# Altium PCB NBP-28 Pin_Swap_Example.PcbDoc (part 4 of 4)
Units mil, origin at the board's own origin, x right, y up, seen from the top; angles counter-clockwise.
Board outline 2716.54 x 3916.86 mil, 10 copper layers (Top Layer, Mid-Layer 1, VCC1V2, Mid-Layer 2, VCC, GND, MidLayer4, VCCINT, Mid-Layer 3, Bottom Layer), stack 81 mil thick; 230 components, 429 nets, 1587 pads, 770 vias.
Unrouted connection lines stored in the file: 563.
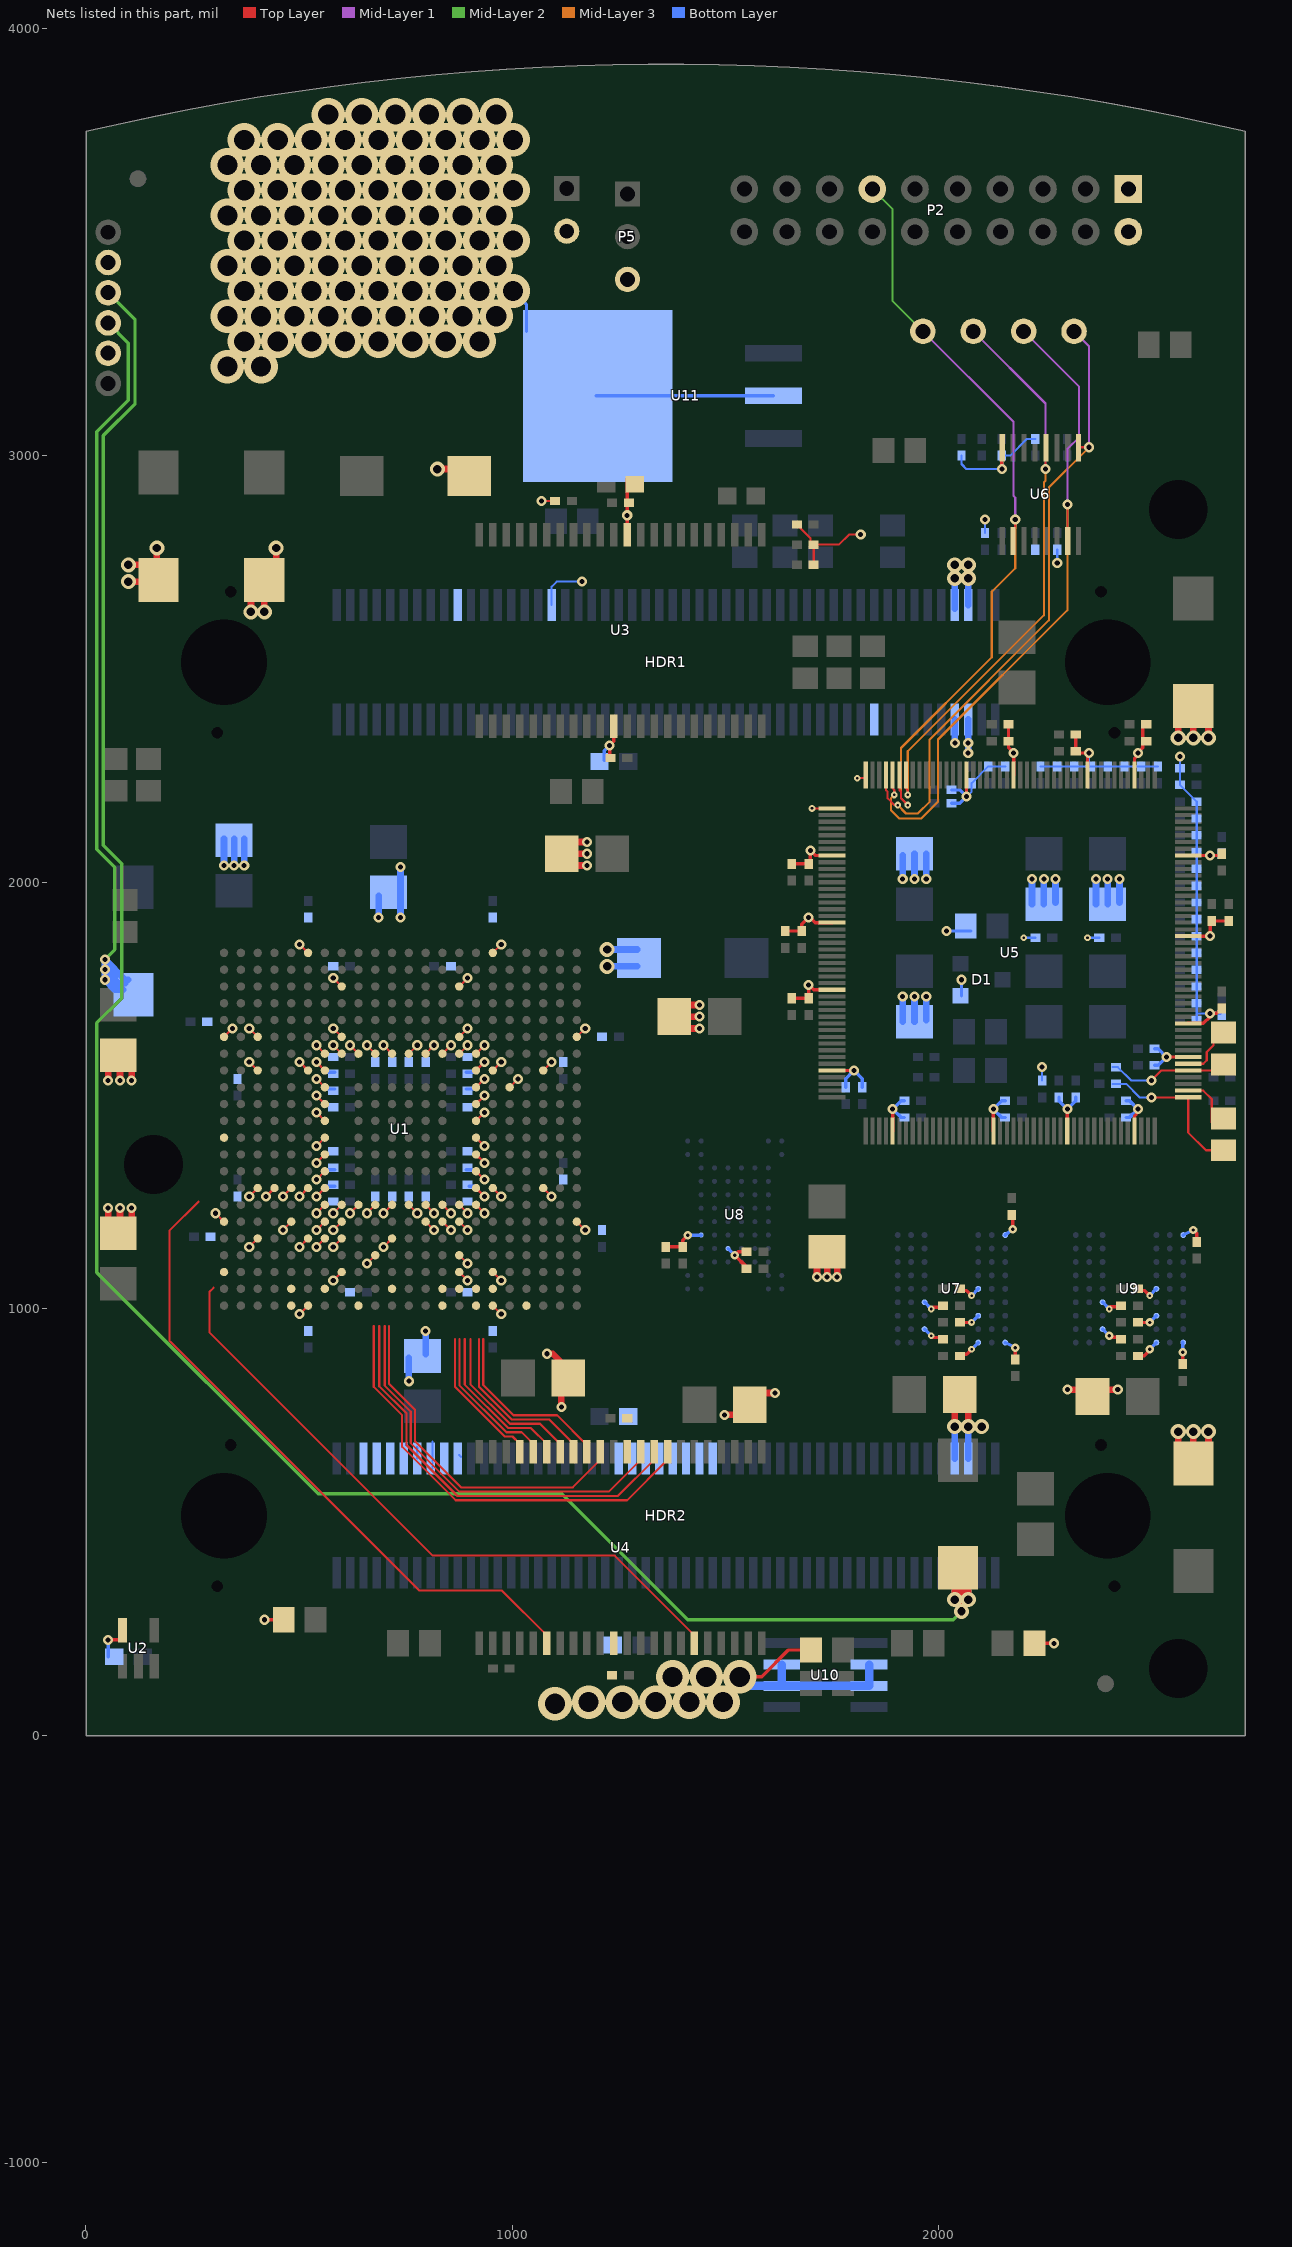
[diagram p10: the nets of this part, all layers, seen from the top]

## Via types
v1: diameter 23.62, hole 11.81, Top Layer to Bottom Layer, 495 vias
v2: diameter 78.74, hole 47.24, Top Layer to Bottom Layer, 101 vias
v3: diameter 15.75, hole 5.91, Top Layer to Bottom Layer, 92 vias
v4: diameter 35.43, hole 19.68, Top Layer to Bottom Layer, 59 vias
v5: diameter 19.68, hole 7.87, Top Layer to Bottom Layer, 23 vias

## Nets (pads, with @x,y where several pads share a name; then routed paths per layer and width w, separated by ;. In a path a pad name is that pad's centre, name@x,y a point inside that pad or via, vN(x,y) a via of type N, cw(c..) or ccw(c..) an arc to the next point about the centre after c; other vN are vias at no path point) (continued)
SRAM1_D9: U1.V7 U4.30 | length 1070.3
  Top Layer w5: v1(541.05,1145.37) U1.V7@560.74,1165.06 ; 675.45,960 675.45,817.45 741.93,750.97 741.93,676.93 867.31,551.54 1269.07,551.54 1363.89,646.36 U4.30@1363.89,665.06
SRAM1_D10: U1.R5 U4.31 | length 1016.9
  Top Layer w5: v1(462.31,1263.48) U1.R5@482,1283.17 ; 688.32,960 688.32,818.72 751.93,755.11 751.93,681.07 871.46,561.54 1247.58,561.54 1332.39,646.36 U4.31@1332.39,665.06
SRAM1_D11: U1.U7 U4.32 | length 963.5
  Top Layer w5: v1(541.05,1184.74) U1.U7@560.74,1204.43 ; 701.15,960 701.15,820.04 761.93,759.26 761.93,685.21 875.6,571.54 1226.08,571.54 1300.89,646.36 U4.32@1300.89,665.06
SRAM1_D12: U1.V8 U4.35 | length 848.3
  Top Layer w5: v1(580.42,1145.37) U1.V8@600.11,1165.06 ; 711.15,960 711.15,824.18 771.93,763.4 771.93,689.36 879.74,581.54 1141.59,581.54 1206.41,646.36 U4.35@1206.41,665.06
SRAM1_D13: U1.AA14 U4.36 | length 424.4
  Top Layer w5: 931.88,928.84 931.88,821.72 1002.91,750.69 1105.24,750.69 1174.91,681.02 U4.36@1174.91,665.06
SRAM1_D14: U1.AB14 U4.37 | length 406.9
  Top Layer w5: 921.88,928.84 921.88,817.58 998.77,740.69 1086.48,740.69 1143.41,683.76 U4.37@1143.41,665.06
SRAM1_D15: U1.U13 U4.38 | length 419.9
  Top Layer w5: U1.U13@796.96,1204.43 v1(816.64,1184.74) ; 901.76,928.84 901.76,823.56 994.63,730.69 1064.99,730.69 1111.92,683.76 U4.38@1111.92,665.06
SRAM1_E: U1.M1 U4.6 | length 1543.4
  Top Layer w5: 265,1251.67 196.41,1183.08 196.41,925.47 199.45,922.43 781.78,340.1 975.26,340.1 1080.42,234.94 U4.6@1080.42,216.24
SRAM1_LB: U1.V11 U4.39 | length 402.1
  Top Layer w5: v1(698.53,1145.37) U1.V11@718.22,1165.06 ; 888.7,928.84 888.7,822.47 990.49,720.69 1043.49,720.69 1080.42,683.76 U4.39@1080.42,665.06
SRAM1_OE: U1.AA11 U4.41 | length 337.2
  Top Layer w5: 865.95,928.84 865.95,816.94 982.2,700.69 1000.5,700.69 1017.43,683.76 U4.41@1017.43,665.06
SRAM1_UB: U1.W10 U4.40 | length 384.2
  Top Layer w5: v1(659.16,1106) U1.W10@678.85,1125.69 ; 875.95,928.84 875.95,821.08 986.35,710.69 1022,710.69 1048.93,683.76 U4.40@1048.93,665.06
SRAM1_W: U1.Y1 U4.17 | length 1558.5
  Top Layer w5: 300,1049.71 290,1039.71 290,945.01 813.47,421.54 1240.27,421.54 1426.88,234.94 U4.17@1426.88,216.24
SW0: HDR2.44 U1.AB16
SW1: HDR2.46 U1.AA15
SW2: HDR2.48 U1.AA16
SW3: HDR2.50 U1.AA17
SW4: HDR2.52 U1.W15 | length 27.8
  Top Layer w5: U1.W15@875.7,1125.69 v1(895.38,1106)
SW5: HDR2.54 U1.AB19
SW6: HDR2.56 U1.Y17 | length 27.8
  Top Layer w5: U1.Y17@954.44,1086.32 v1(974.12,1066.63)
SW7: HDR2.58 U1.U14 | length 27.8
  Top Layer w5: U1.U14@836.33,1204.43 v1(856.01,1184.74)
SWC0: HDR2.18 U1.R4 | length 27.8
  Top Layer w5: v1(422.94,1263.48) U1.R4@442.63,1283.17
SWC1: HDR2.16 U1.AA7 | length 63
  Bottom Layer w5: HDR2.16@812.7,625.69 812.7,688.68
SWC2: HDR2.14 U1.U5 | length 55.4
  Top Layer w5: v1(462.31,1184.74) U1.U5@482,1204.43
  Bottom Layer w5: HDR2.14@777.27,649.31 HDR2.14@777.27,676.87
SWC3: HDR2.6 U1.V3 | length 27.8
  Top Layer w5: v1(383.57,1145.37) U1.V3@403.26,1165.06
SWR0: HDR2.20 U1.AB9 | length 5.6
  Bottom Layer w5: HDR2.20@875.7,657.18 HDR2.20@879.63,653.25
SWR1: HDR2.12 U1.V6 | length 27.8
  Top Layer w5: v1(501.68,1145.37) U1.V6@521.37,1165.06
SWR2: HDR2.10 U1.AA5
SWR3: HDR2.8 U1.AB5
TCLK: TP4.1 U5.173 U6.9 | length 1476.8
  Top Layer w5: U5.173@1875.7,2251.67 1875.7,2216.24 1879.63,2212.3 1879.63,2196.55 1895.38,2180.81 v3(1903.26,2180.81) ; U6.9@2328.45,3019.39 v1(2352.08,3019.39)
  Mid-Layer 1 w5: TP4.1@2316.64,3291.04 2352.08,3255.61 v1(2352.08,3019.39)
  Mid-Layer 3 w5: v3(1903.26,2180.81) 1922.94,2161.12 1950.5,2161.12 1978.06,2188.68 1978.06,2334.35 2257.59,2613.88 2257.59,2924.9 v1(2352.08,3019.39)
TDI: TP6.1 U5.172 U6.7 | length 1600.1
  Top Layer w5: U5.172@1891.45,2251.67 1891.45,2220.18 1895.38,2216.24 v3(1895.38,2204.43) ; U6.7@2300.89,2800.89 v1(2300.89,2885.53)
  Mid-Layer 1 w5: TP6.1@2198.53,3291.04 2328.45,3161.12 2328.45,3043.01 2300.89,3015.45 v1(2300.89,2885.53)
  Mid-Layer 3 w5: v3(1895.38,2204.43) 1887.51,2196.55 1887.51,2169 1907.19,2149.31 1958.37,2149.31 1997.74,2188.68 1997.74,2334.35 2300.89,2637.5 v1(2300.89,2885.53)
TDO: P2.13 TP3.1 U5.171 U6.2 | length 1809.7
  Top Layer w5: U5.171@1907.19,2251.67 1907.19,2216.24 1911.13,2212.3 1911.13,2196.56 v3(1926.88,2180.81) ; U6.2@2170.97,2822.54 2178.85,2830.41 v1(2178.85,2850.1)
  Mid-Layer 1 w5: TP3.1@1962.31,3291.04 2174.91,3078.44 2174.91,2905.22 2178.85,2901.28 v1(2178.85,2850.1)
  Mid-Layer 2 w5: P2.13@1843.81,3624.51 1891.45,3576.87 1891.45,3361.91 TP3.1@1962.31,3291.04
  Mid-Layer 3 w5: v3(1926.88,2180.81) 1911.13,2196.56 1911.13,2314.67 2123.73,2527.26 2123.73,2680.81 2178.85,2735.92 v1(2178.85,2850.1)
TEST: HDR1.81 U1.J18 | length 27.8
  Top Layer w5: U1.J18@993.81,1519.39 v1(1013.49,1539.08)
TMS: TP5.1 U5.170 U6.12 | length 1388.5
  Top Layer w5: U5.170@1922.94,2251.67 1922.94,2220.18 1926.88,2216.24 v3(1926.88,2204.43) ; v1(2249.71,2968.21) U6.12@2249.71,3017.42
  Mid-Layer 1 w5: TP5.1@2080.42,3291.04 2249.71,3121.75 v1(2249.71,2968.21)
  Mid-Layer 3 w5: v3(1926.88,2204.43) 1926.88,2306.79 2245.78,2625.69 2245.78,2936.71 2249.71,2940.65 v1(2249.71,2968.21)
VCC1V2: C16.1 C17.1 C18.1 C19.1 C20.1 C21.1 C22.1 C23.1 C24.1 C25.1 C26.1 C27.1 C28.1 C29.1 C130.1 C131.1 TP9.1 U1.G7 U1.G8 U1.G15 U1.G16 U1.H7 U1.H16 U1.R7 U1.R16 U1.T7 U1.T8 U1.T15 U1.T16 U11.2 U11.4 | length 1550.3
  Top Layer w5: v1(541.05,1224.11) U1.T7@560.74,1243.8 ; v1(541.05,1263.48) U1.R7@560.74,1283.17 ; v1(541.05,1578.45) U1.H7@560.74,1558.76 ; v1(541.05,1617.82) U1.G7@560.74,1598.13 ; v1(580.42,1224.11) U1.T8@600.11,1243.8 ; v1(580.42,1617.82) U1.G8@600.11,1598.13 ; U1.T15@875.7,1243.8 v1(895.38,1224.11) ; U1.G15@875.7,1598.13 v1(895.38,1617.82) ; U1.T16@915.07,1243.8 v1(934.75,1224.11) ; U1.R16@915.07,1283.17 v1(934.75,1263.48) ; U1.H16@915.07,1558.76 v1(934.75,1578.45) ; U1.G16@915.07,1598.13 v1(934.75,1617.82)
  Top Layer w15.75: v4(100.11,2704.43) C130.1@174.91,2704.43 ; v4(100.11,2743.8) C130.1@163.1,2743.8 ; C130.1@167.04,2716.24 v4(167.04,2783.17) ; v4(824.52,2968.21) C131.1@883.57,2968.21
  Bottom Layer w7.87: 564.67,1287.11 C20.1@584.36,1287.11 ; 564.67,1326.48 C25.1@584.36,1326.48 ; 564.67,1515.45 C23.1@584.36,1515.45 ; 564.67,1554.82 C21.1@584.36,1554.82 ; C27.1@891.45,1326.48 911.13,1326.48 ; C29.1@891.45,1515.45 911.13,1515.45 ; C19.1@891.45,1554.82 911.13,1554.82 ; C18.1@899.32,1287.11 911.13,1287.11 ; v2(1001.68,3385.53) 1033.18,3354.04 U11.4@1033.18,3291.04 ; U11.4@1196.17,3139.86 U11.4@1200.5,3139.86 U11.2@1611.92,3139.86
  Bottom Layer w15.75: v1(686.72,1917.03) C17.1@686.72,1968.21 ; v1(737.9,1917.03) v1(737.9,2035.14) ; v1(757.59,830.41) C16.1@757.59,885.53 ; C16.1@796.96,893.41 v1(796.96,948.52)
  other v2: 332.39,3208.37 411.13,3208.37 371.76,3267.42 450.5,3267.42 529.24,3267.42 607.98,3267.42 686.72,3267.42 765.46,3267.42 844.2,3267.42 922.94,3267.42 332.39,3326.48 411.13,3326.48 489.87,3326.48 568.61,3326.48 647.35,3326.48 726.09,3326.48 804.83,3326.48 883.57,3326.48 962.31,3326.48 371.76,3385.53 450.5,3385.53 529.24,3385.53 607.98,3385.53 686.72,3385.53 765.46,3385.53 844.2,3385.53 922.94,3385.53 332.39,3444.59 411.13,3444.59 489.87,3444.59 568.61,3444.59 647.35,3444.59 726.09,3444.59 804.83,3444.59 883.57,3444.59 962.31,3444.59 371.76,3503.64 450.5,3503.64 529.24,3503.64 607.98,3503.64 686.72,3503.64 765.46,3503.64 844.2,3503.64 922.94,3503.64 1001.68,3503.64 332.39,3562.7 411.13,3562.7 489.87,3562.7 568.61,3562.7 647.35,3562.7 726.09,3562.7 804.83,3562.7 883.57,3562.7 962.31,3562.7 371.76,3621.75 450.5,3621.75 529.24,3621.75 607.98,3621.75 686.72,3621.75 765.46,3621.75 844.2,3621.75 922.94,3621.75 1001.68,3621.75 332.39,3680.81 411.13,3680.81 489.87,3680.81 568.61,3680.81 647.35,3680.81 726.09,3680.81 804.83,3680.81 883.57,3680.81 962.31,3680.81 371.76,3739.86 450.5,3739.86 529.24,3739.86 607.98,3739.86 686.72,3739.86 765.46,3739.86 844.2,3739.86 922.94,3739.86 1001.68,3739.86 568.61,3798.92 647.35,3798.92 726.09,3798.92 804.83,3798.92 883.57,3798.92 962.31,3798.92
VCC1V8: C88.1 C89.1 C90.1 C91.1 C92.1 C93.1 C94.1 C95.1 C96.1 C97.1 C98.1 C99.1 C100.1 C101.1 C132.1 C133.1 D1.1 HDR1.93 HDR1.95 HDR2.93 HDR2.95 R59.1 TP2.1 U5.40 U5.75 U5.95 U5.113 U5.136 U5.154 | length 6648
  Top Layer w7.87: U5.40@1749.71,1558.76 v1(1800.89,1558.76) ; C95.1@2163.1,2369.78 C96.1@2163.1,2330.41 2163.1,2314.67 v1(2174.91,2302.85) U5.154@2174.91,2251.67 ; U5.75@2300.89,1417.03 v1(2300.89,1468.21) ; U5.136@2458.37,2251.67 2458.37,2291.04 v1@2466.25,2298.92 ; v1(2466.25,2302.85) 2478.06,2314.67 C94.1@2478.06,2373.72 ; v1(2533.18,1590.26) U5.95@2584.36,1590.26 ; U5.113@2584.36,1873.72 v1(2635.54,1873.72) C101.1@2635.54,1905.22 ; C101.1@2639.48,1909.15 C93.1@2678.85,1909.15
  Top Layer w15.75: v4(2037.11,318.6) C132.1@2037.11,377.66 ; v4(2052.86,291.04) C132.1@2052.86,393.41 ; v4(2068.61,318.6) C132.1@2068.61,389.47 ; v4(2560.74,2338.29) C133.1@2560.74,2401.28 ; v4(2596.17,2338.29) C133.1@2596.17,2397.34 ; v4(2631.6,2338.29) C133.1@2631.6,2413.09
  Mid-Layer 2 w7.87: TP2.1@52.86,3381.59 115.85,3318.6 115.85,3121.75 41.05,3046.95 41.05,2086.32 84.36,2043.01 84.36,1728.05 26.36,1670.06 26.36,1085.26 544.99,566.63 1115.85,566.63 1411.13,271.36 2033.18,271.36 v4(2052.86,291.04)
  Bottom Layer w7.87: C97.1@1781.21,1519.39 1781.21,1539.07 v1(1800.89,1558.76) 1820.58,1539.07 C92.1@1820.58,1519.39 ; 2029.24,1885.53 R59.1@2074.52,1885.53 ; D1.1@2052.86,1733.96 v1(2052.86,1771.36) ; C98.1@2281.21,1495.77 2281.21,1487.89 v1(2300.89,1468.21) 2320.58,1487.89 C91.1@2320.58,1495.77 ; C99.1@2505.62,1570.57 2513.49,1570.57 v1(2533.18,1590.26) 2513.49,1609.94 C90.1@2505.62,1609.94
  Bottom Layer w15.75: C88.1@1915.07,1672.93 v1(1915.07,1731.99) ; C88.1@1942.63,1672.93 v1(1942.63,1731.99) ; C88.1@1970.19,1676.87 v1(1970.19,1731.99) ; v4(2037.11,318.6) HDR2.93@2037.12,381.59 ; v1(2037.11,2326.48) HDR1.93@2037.11,2381.59 ; v4(2068.61,318.6) HDR2.95@2068.61,381.59 ; v1(2068.61,2302.85) v1(2068.61,2326.48) HDR1.95@2068.61,2381.59 ; C89.1@2218.22,1948.52 v1(2218.22,2007.58) ; C89.1@2245.78,1948.52 v1(2245.78,2007.58) ; C89.1@2273.33,1952.46 v1(2273.33,2007.58)
  other v1: 2017.43,1885.53
VCC2V5: C2.1 C3.1 C4.1 C5.1 C6.1 C7.1 C8.1 C9.1 C10.1 C11.1 C128.1 C129.1 R64.1 TP7.1 U1.A6 U1.A17 U1.AB6 U1.AB17 U1.F1 U1.F22 U1.U1 U1.U22 U10.2 U10.3 U10.6 U10.7 | length 3137.9
  Top Layer w5: v1(304.83,1224.11) U1.U1@324.52,1204.43 ; U1.F1@324.52,1637.5 v1(344.2,1657.19) ; v1(501.68,987.89) U1.AB6@521.37,1007.58 ; v1(501.68,1854.04) U1.A6@521.37,1834.35 ; U1.AB17@954.44,1007.58 v1(974.12,987.89) ; U1.A17@954.44,1834.35 v1(974.12,1854.04) ; U1.U22@1151.29,1204.43 v1(1170.97,1184.74) ; U1.F22@1151.29,1637.5 v1(1170.97,1657.19)
  Top Layer w7.87: v2(1533.18,137.5) 1584.36,137.5 1647.35,200.49 R64.1@1700.5,200.49
  Top Layer w15.75: C3.1@44.99,1172.93 52.86,1176.87 v1(52.86,1235.92) ; C3.1@76.48,1172.93 80.42,1176.87 v1(80.42,1235.92) ; C3.1@107.98,1172.93 v1(107.98,1235.92) ; v1(1081.65,894.79) 1094.79,894.79 C2.1@1127.67,861.91 ; v1(1115,770) 1115,802 C2.1@1131.6,818.6
  Mid-Layer 2 w7.87: v1(44.99,1818.6) 68.61,1842.22 68.61,2035.14 26.36,2077.38 26.36,3055.88 100.11,3129.63 100.11,3263.48 TP7.1@52.86,3310.73
  Bottom Layer w15.75: v1(44.99,1771.36) 68.61,1747.74 C128.1@88.3,1747.74 ; C128.1@68.61,1779.23 44.99,1802.85 v1(44.99,1818.6) 92.23,1771.36 C128.1@100.11,1771.36 ; C128.1@72.55,1755.61 44.99,1783.17 v1(44.99,1794.98) 76.48,1763.48 C128.1@92.23,1763.48 ; v4(1222.15,1802.85) C129.1@1293.02,1802.85 ; v4(1222.15,1842.22) C129.1@1293.02,1842.22
  Bottom Layer w20: v2(1533.18,137.5) 1554.24,116.44 U10.6@1631.6,116.44 ; U10.7@1631.6,166.44 U10.6@1631.6,116.44 ; U10.2@1836.33,166.44 U10.3@1836.33,116.44 U10.6@1631.6,116.44
  other v2: 1100.11,74.51 1178.85,78.44 1257.59,78.44 1336.33,78.44 1415.07,78.44 1493.81,78.44 1375.7,137.5 1454.44,137.5
VCC3V3: C1.2 C12.1 C13.1 C14.1 C15.1 C30.1 C31.1 C32.1 C33.1 C34.1 C35.1 C36.1 C37.1 C38.1 C39.1 C40.1 C41.1 C42.1 C43.1 C44.1 C45.1 C46.1 C47.1 C48.1 C49.1 C50.1 C51.1 C52.1 C53.1 C54.1 C55.1 C56.1 C57.1 C58.1 C62.1 C66.1 C67.1 C68.1 C69.1 C70.1 C71.1 C72.1 C73.1 C74.1 C75.1 C76.1 C77.1 C78.1 C79.1 C80.1 C81.1 C82.1 C83.1 C84.1 C85.1 C86.1 C87.1 C102.1 C103.1 C104.1 C105.1 C106.1 C107.1 C108.1 C109.1 C110.1 C111.1 C112.1 C113.1 C114.1 C115.1 C116.1 C117.1 C118.1 C119.1 C120.1 C121.1 C122.1 C126.1 C127.1 HDR1.34 HDR1.94 HDR1.96 HDR2.94 HDR2.96 P1.2 P2.1 P2.2 P5.3 R1.1 R5.1 R15.2 R16.2 R17.2 R18.2 R20.2 R21.2 R22.2 R23.2 R24.2 R25.2 R26.2 R27.2 R28.2 R29.2 R30.2 R31.2 R32.2 R33.2 R34.2 R35.2 R39.2 R40.2 R41.2 R42.2 R43.2 R45.2 R48.2 R49.2 R50.2 R51.2 R52.2 R53.2 R54.2 R55.2 R56.2 R57.2 R61.1 R62.1 R67.1 TP1.1 U1.C8 U1.C15 U1.F8 U1.F15 U1.G9 U1.G10 U1.G11 U1.G12 U1.G13 U1.G14 U1.H3 U1.H6 U1.H17 U1.H20 U1.J7 U1.J16 U1.K7 U1.K16 U1.L7 U1.L16 U1.M7 U1.M16 U1.N7 U1.N16 U1.P7 U1.P16 U1.R3 U1.R6 U1.R17 U1.R20 U1.T9 U1.T10 U1.T11 U1.T12 U1.T13 U1.T14 U1.U8 U1.U15 U1.Y8 U1.Y15 U2.5 U3.11 U3.33 U4.11 U4.33 U5.1 U5.8 U5.18 U5.28 U5.49 U5.64 U5.85 U5.100 U5.125 U5.143 U5.161 U5.176 U6.16 U7.A7 U7.A9 U7.B3 U7.C7 U7.D3 U7.E7 U7.J9 U8.H7 U8.J5 U9.A7 U9.A9 U9.B3 U9.C7 U9.D3 U9.E7 U9.J9 | length 8194.9
  Top Layer w5: v1(383.57,1263.48) U1.R3@403.26,1283.17 ; v1(383.57,1578.45) U1.H3@403.26,1558.76 ; v1(501.68,1263.48) U1.R6@521.37,1283.17 ; v1(501.68,1578.45) U1.H6@521.37,1558.76 ; v1(541.05,1302.85) U1.P7@560.74,1322.54 ; v1(541.05,1342.22) U1.N7@560.74,1361.91 ; v1(541.05,1381.59) U1.M7@560.74,1401.28 ; v1(541.05,1460.34) U1.L7@560.74,1440.65 ; v1(541.05,1499.71) U1.K7@560.74,1480.02 ; v1(541.05,1539.08) U1.J7@560.74,1519.39 ; v1(580.42,1066.63) U1.Y8@600.11,1086.32 ; v1(580.42,1184.74) U1.U8@600.11,1204.43 ; v1(580.42,1657.19) U1.F8@600.11,1637.5 ; v1(580.42,1775.3) U1.C8@600.11,1755.61 ; v1(619.79,1224.11) U1.T9@639.48,1243.8 ; v1(619.79,1617.82) U1.G9@639.48,1598.13 ; v1(659.16,1224.11) U1.T10@678.85,1243.8 ; v1(659.16,1617.82) U1.G10@678.85,1598.13 ; v1(698.53,1224.11) U1.T11@718.22,1243.8 ; v1(698.53,1617.82) U1.G11@718.22,1598.13 ; U1.T12@757.59,1243.8 v1(777.27,1224.11) ; U1.G12@757.59,1598.13 v1(777.27,1617.82) ; U1.T13@796.96,1243.8 v1(816.64,1224.11) ; U1.G13@796.96,1598.13 v1(816.64,1617.82) ; U1.T14@836.33,1243.8 v1(856.01,1224.11) ; U1.G14@836.33,1598.13 v1(856.01,1617.82) ; U1.Y15@875.7,1086.32 v1(895.38,1066.63) ; U1.U15@875.7,1204.43 v1(895.38,1184.74) ; U1.F15@875.7,1637.5 v1(895.38,1657.19) ; U1.C15@875.7,1755.61 v1(895.38,1775.3) ; U1.P16@915.07,1322.54 v1(934.75,1302.85) ; U1.N16@915.07,1361.91 v1(934.75,1342.22) ; U1.M16@915.07,1401.28 v1(934.75,1381.59) ; U1.L16@915.07,1440.65 v1(934.75,1460.34) ; U1.K16@915.07,1480.02 v1(934.75,1499.71) ; U1.J16@915.07,1519.39 v1(934.75,1539.08) ; U1.R17@954.44,1283.17 v1(974.12,1263.48) ; U1.H17@954.44,1558.76 v1(974.12,1578.45) ; v1(1068.61,2893.41) R17.2@1100.11,2893.41 ; U1.R20@1072.55,1283.17 v1(1092.23,1263.48) ; U1.H20@1072.55,1558.76 v1(1092.23,1578.45) ; R24.2@1667.04,2838.29 1698.53,2806.79 R15.2@1698.53,2791.04 ; v3(1702.47,2172.93) U5.1@1749.71,2172.93 ; R18.2@1706.41,2743.8 R15.2@1706.41,2791.04 1765.46,2791.04 1789.08,2814.67 v1(1816.64,2814.67) ; v3(1808.77,2243.8) U5.176@1828.45,2243.8
  Top Layer w7.87: v1(52.86,224.11) U2.5@92.23,224.11 ; v1(419,271.36) R16.2@464.28,271.36 ; C53.1@1230.03,2291.04 1228.06,2293.01 v1(1228.06,2320.57) 1237.9,2330.41 U3.11@1237.9,2365.85 ; U3.33@1269.4,2809.74 U3.33@1269.4,2814.67 v1(1269.4,2859.94) C51.1@1269.4,2944.59 ; C105.1@1359.95,1145.37 C104.1@1399.32,1145.37 1399.32,1161.12 v5(1411.13,1172.93) ; C103.1@1548.93,1094.19 1548.93,1098.13 v5(1521.37,1125.69) 1529.24,1133.56 C106.1@1548.93,1133.56 ; C71.1@1639.48,1885.53 C81.1@1678.85,1885.53 1678.85,1901.28 v1(1694.59,1917.03) 1698.53,1917.03 1710.34,1905.22 U5.18@1749.71,1905.22 ; C70.1@1655.22,1728.05 C80.1@1694.59,1728.05 v1(1694.59,1759.55) 1706.41,1747.74 U5.28@1749.71,1747.74 ; C68.1@1655.22,2043.01 C78.1@1694.59,2043.01 ; C78.1@1698.53,2046.95 v1(1698.53,2074.51) 1710.34,2062.7 U5.8@1749.71,2062.7 ; U5.49@1891.45,1417.03 v1(1891.45,1468.21) ; v3(1982,936.71) 1985.93,932.78 C119.1@2013.49,932.78 ; v3(1982,999.7) 1985.93,1003.64 C121.1@2005.62,1003.64 ; C120.1@2044.99,893.41 2064.67,893.41 v3(2076.48,905.22) ; C109.1@2044.99,1043.01 2064.67,1043.01 v3(2076.48,1031.2) ; C118.1@2048.93,968.21 v3(2076.48,968.21) ; v1(2064.67,2200.49) U5.161@2064.67,2251.67 ; U5.64@2127.67,1417.03 v1(2127.67,1468.21) ; v1(2147.35,2968.21) U6.16@2147.35,3017.42 ; v5(2172.94,1186.71) C122.1@2172.94,1218.21 ; C108.1@2178.85,885.53 v5(2178.85,909.15) ; R5.1@2224.12,216.24 v1(2269.4,216.24) ; C86.1@2320.58,2306.79 C76.1@2320.58,2346.16 ; C86.1@2324.52,2302.85 v1(2352.08,2302.85) ; U5.143@2348.14,2251.67 v1@2348.14,2298.92 ; v3@2398.32,1000.7 2402.26,1004.64 C116.1@2421.95,1004.64 ; v5@2398.33,937.71 2402.26,933.78 C115.1@2429.82,933.78 ; U5.85@2458.37,1417.03 2458.37,1452.46 2466.25,1460.33 v1(2466.25,1468.21) ; C117.1@2461.32,890.47 2481,890.47 v5@2492.82,902.28 ; C107.1@2462.31,1043.01 2482,1043.01 v3(2493.81,1031.2) ; C112.1@2466.25,968.21 v5(2493.81,968.21) ; C114.1@2571.56,870.78 v5(2571.56,898.34) ; U5.100@2584.36,1669 2619.79,1669 2635.54,1684.74 v1(2635.54,1692.62) 2651.29,1692.62 C84.1@2663.1,1704.43 ; U5.125@2584.36,2062.7 v1(2635.54,2062.7) C75.1@2659.16,2062.7 ; v5(2596.17,1184.74) 2604.04,1176.87 C113.1@2604.04,1157.18
  Top Layer w15.75: C32.1@44.99,1598.13 52.86,1594.19 v1(52.86,1535.14) ; C32.1@76.48,1598.13 80.42,1594.19 v1(80.42,1535.14) ; v1(107.98,1535.14) C32.1@107.98,1598.13 ; v4(387.51,2633.56) C127.1@387.51,2696.55 ; v4(419,2633.56) C127.1@419,2692.62 ; C127.1@446.56,2720.18 v4(446.56,2783.17) ; C49.1@1111.92,2039.07 v1(1174.91,2039.07) ; C49.1@1111.92,2094.19 v1(1174.91,2094.19) ; C49.1@1115.85,2066.63 v1(1174.91,2066.63) ; C31.1@1375.7,1657.18 v1(1438.69,1657.18) ; C31.1@1375.7,1712.3 v1(1438.69,1712.3) ; C31.1@1379.63,1684.74 v1(1438.69,1684.74) ; v1(1497.74,751.67) C50.1@1548.93,751.67 ; C50.1@1552.86,802.85 v1(1615.85,802.85) ; v1(1714.28,1074.51) C102.1@1714.28,1117.81 ; v1(1737.9,1074.51) C102.1@1737.9,1125.69 ; v1(1761.52,1074.51) C102.1@1761.52,1121.75 ; v4(2037.11,724.11) C110.1@2037.11,783.17 ; C110.1@2048.93,798.92 2068.61,779.23 v4(2068.61,724.11) ; v1(2300.89,810.73) v1(2419,810.73) ; C126.1@2560.74,669 v4(2560.74,712.3) ; C126.1@2596.17,637.5 v4(2596.17,712.3) ; C126.1@2631.6,653.25 v4(2631.6,712.3)
  Bottom Layer w5: HDR1.34@1092.23,2649.31 1092.23,2692.62 1104.04,2704.43 v1(1163.1,2704.43) ; R67.1@2052.86,2999.7 2052.86,2980.02 2064.67,2968.21 v1(2147.35,2968.21) ; v1(2064.67,2200.49) 2076.48,2212.3 R56.2@2076.48,2231.99 R55.2@2115.85,2271.36 R54.2@2155.22,2271.36 ; R57.2@2107.98,2818.6 v1(2107.98,2850.1) ; C62.1@2147.35,2999.7 2167.04,2999.7 2206.41,3039.07 R62.1@2226.09,3039.07 ; v3(2198.53,1869.78) R29.2@2226.09,1869.78 ; R52.2@2237.9,2271.36 R51.2@2352.08,2271.36 ; R20.2@2241.84,1535.14 v1(2241.84,1566.63) ; v1(2277.27,2747.74) R61.1@2277.27,2779.23 ; v3(2348.14,1869.78) R30.2@2375.7,1869.78 ; v1(2352.08,2302.85) R51.2@2352.08,2271.36 ; R41.2@2513.49,2271.36 R42.2@2474.12,2271.36 R51.2@2352.08,2271.36 ; v1(2564.67,2294.98) R49.2@2564.67,2267.42 R40.2@2564.67,2228.05 R48.2@2604.04,2188.68 R39.2@2604.04,2149.31 R28.2@2604.04,1991.83 R35.2@2604.04,1873.72 R21.2@2604.04,1755.61 2604.04,1692.62 ; R23.2@2604.04,1676.87 2604.04,1692.62 ; R26.2@2607.98,2062.7 v1(2635.54,2062.7) ; v1(2635.54,1692.62) 2604.04,1692.62
  Bottom Layer w7.87: C1.2@52.86,184.74 v1(52.86,224.11) ; C52.1@1215.26,2285.14 1215.26,2307.78 v1(1228.06,2320.57) ; v5(1411.13,1172.93) U8.H7@1442.63,1172.93 ; U8.J5@1505.62,1141.44 v5(1521.37,1125.69) ; C79.1@1919,1448.52 1911.13,1448.52 v1(1891.45,1468.21) 1911.13,1487.89 C69.1@1919,1487.89 ; U7.B3@1966.25,952.46 v3(1982,936.71) ; U7.D3@1966.25,1015.45 v3(1982,999.7) ; C87.1@2029.24,2184.74 2048.93,2184.74 v1(2064.67,2200.49) 2048.93,2216.24 C77.1@2029.24,2216.24 ; v3(2076.48,905.22) U7.A7@2092.23,920.96 ; v3(2076.48,968.21) U7.C7@2092.23,983.96 ; v3(2076.48,1031.2) U7.E7@2092.23,1046.95 ; v1(2147.35,2968.21) C62.1@2147.35,2999.7 ; U7.A9@2155.22,920.96 v5(2178.85,909.15) ; U7.J9@2155.22,1172.93 v5(2172.94,1186.71) ; C83.1@2155.22,1448.52 2147.35,1448.52 v1(2127.67,1468.21) 2147.35,1487.89 C73.1@2155.22,1487.89 ; U9.B3@2383.57,952.46 v5(2399.32,936.71) ; U9.D3@2383.57,1015.45 v3(2399.32,999.7) ; C82.1@2438.69,1448.52 2446.56,1448.52 v1(2466.25,1468.21) 2446.56,1487.89 C72.1@2438.69,1487.89 ; v5(2493.81,905.22) U9.A7@2509.56,920.96 ; v5(2493.81,968.21) U9.C7@2509.56,983.96 ; v3(2493.81,1031.2) U9.E7@2509.56,1046.95 ; v5(2571.56,898.34) U9.A9@2571.56,921.96 ; U9.J9@2572.55,1172.93 v5(2596.17,1184.74) ; v1(2635.54,1692.62) C74.1@2659.16,1692.62 ; v1(2635.54,2062.7) C85.1@2659.16,2062.7
  Bottom Layer w15.75: v1(324.52,2039.07) C30.1@324.52,2102.07 ; v1(348.14,2039.07) C30.1@348.14,2098.13 C30.1@348.14,2102.07 ; v1(371.76,2039.07) C30.1@371.76,2102.07 ; v1(1915.07,2007.58) C67.1@1915.07,2062.7 ; v1(1942.63,2007.58) C67.1@1942.63,2066.63 ; v1(1970.19,2007.58) C67.1@1970.19,2066.63 ; HDR2.94@2037.12,649.31 v4(2037.11,724.11) v4(2068.61,724.11) ; HDR1.94@2037.11,2641.44 HDR1.94@2037.11,2649.31 v4(2037.11,2712.3) ; HDR2.96@2068.61,649.31 v4(2068.61,724.11) ; HDR1.96@2068.61,2649.31 v4(2068.61,2712.3) ; v4(2100.11,724.11) v4(2068.61,724.11) ; C66.1@2367.82,1948.52 v1(2367.82,2007.58) ; C66.1@2395.38,1948.52 v1(2395.38,2007.58) ; C66.1@2422.94,1952.46 v1(2422.94,2007.58) ; v4(2037.11,2712.3) v4(2068.61,2712.3) ; v4(2037.11,2712.3) v4(2037.11,2743.8) v4(2068.61,2743.8) v4(2068.61,2712.3)
VDRIVE: HDR1.20 U1.F3 | length 27.8
  Top Layer w5: v1(383.57,1657.19) U1.F3@403.26,1637.5
XTALIN: C59.2 R38.1 U5.93 | length 278.7
  Top Layer w5: v1(2497.74,1535.14) 2521.37,1558.76 U5.93@2584.36,1558.76 R38.1@2663.1,1558.76
  Bottom Layer w5: C59.2@2407.19,1566.63 C59.2@2415.07,1566.63 2419,1566.63 2450.5,1535.14 v1(2497.74,1535.14)
XTALIN_32K: C60.2 R47.1 U5.89 | length 372.7
  Top Layer w5: v1(2497.74,1495.77) U5.89@2584.36,1495.77 2584.36,1413.09 2625.7,1371.75 R47.1@2667.04,1371.75
  Bottom Layer w5: C60.2@2407.19,1527.26 C60.2@2415.07,1527.26 2438.69,1527.26 2470.19,1495.77 v1(2497.74,1495.77)
XTALOUT: R38.2 U5.94 | length 108.2
  Top Layer w5: U5.94@2584.36,1574.51 2619.79,1574.51 2627.67,1582.38 2627.67,1602.07 2643.41,1617.81 R38.2@2643.41,1637.5
XTALOUT_32K: R47.2 U5.90 | length 118.4
  Top Layer w5: U5.90@2584.36,1511.52 2619.79,1511.52 2639.48,1491.83 R47.2@2639.48,1436.71
pads on no net: D1.2 HDR1.91 HDR1.MH1 HDR1.MH2 HDR1.MH3 HDR1.MH4 HDR1.MH5 HDR1.MH6 HDR2.MH1 HDR2.MH2 HDR2.MH3 HDR2.MH4 HDR2.MH5 HDR2.MH6 U2.1 U5.145 U5.157 U5.162 U7.E2 U8.A1 U8.A2 U8.A7 U8.A8 U8.B1 U8.B7 U8.B8 U8.L1 U8.L2 U8.L7 U8.L8 U8.M1 U8.M2 U8.M7 U8.M8 U9.E2 U10.5 U10.8

## Polygon pours and split planes (outlines as drawn)
VCC1V2 on VCC1V2 (split plane): 1428.26,3896.61 1496.59,3895.42 1564.91,3893.45 1633.19,3890.69 1701.44,3887.14 1769.64,3882.8 1837.79,3877.67 1905.87,3871.76 1973.89,3865.06 2041.82,3857.58 2109.65,3849.31 2177.39,3840.26 2245.02,3830.43 2312.53,3819.81 2379.92,3808.42 2447.17,3796.25 2514.27,3783.31 2581.22,3769.59 2648.01,3755.1 2698.12,3743.61 2698.12,20.1 21.78,20.1 21.78,3743.63 71.84,3755.1 138.63,3769.59 205.57,3783.31 272.68,3796.25 339.93,3808.42 407.31,3819.81 474.82,3830.43 542.45,3840.26 610.19,3849.31 678.03,3857.58 745.96,3865.06 813.97,3871.76 882.06,3877.67 950.2,3882.8 1018.41,3887.14 1086.66,3890.69 1154.94,3893.45 1223.25,3895.42 1291.58,3896.61 1359.92,3897
VCC1V8 on VCC1V2 (split plane): 2684.9,2362.89 2684.9,1535 2684.9,227.11 2679.13,221.34 2015.87,221.34 1945.1,292.11 1945.1,1300 1944.71,1301.95 1943.6,1303.6 1740.1,1507.11 1740.1,2112.89 1993.6,2366.4 1993.61,2366.4 2022.11,2394.9 2652.89,2394.9
VCC3V3 on VCC (split plane): 1428.26,3896.61 1496.59,3895.42 1564.91,3893.45 1633.19,3890.69 1701.44,3887.14 1769.64,3882.8 1837.79,3877.67 1905.87,3871.76 1973.89,3865.06 2041.82,3857.58 2109.65,3849.31 2177.39,3840.26 2245.02,3830.43 2312.53,3819.81 2379.92,3808.42 2447.17,3796.25 2514.27,3783.31 2581.22,3769.59 2648.01,3755.1 2698.12,3743.61 2698.12,20.1 21.78,20.1 21.78,3743.63 71.84,3755.1 138.63,3769.59 205.57,3783.31 272.68,3796.25 339.93,3808.42 407.31,3819.81 474.82,3830.43 542.45,3840.26 610.19,3849.31 678.03,3857.58 745.96,3865.06 813.97,3871.76 882.06,3877.67 950.2,3882.8 1018.41,3887.14 1086.66,3890.69 1154.94,3893.45 1223.25,3895.42 1291.58,3896.61 1359.92,3897
GND on GND (split plane): 1428.26,3896.61 1496.59,3895.42 1564.91,3893.45 1633.19,3890.69 1701.44,3887.14 1769.64,3882.8 1837.79,3877.67 1905.87,3871.76 1973.89,3865.06 2041.82,3857.58 2109.65,3849.31 2177.39,3840.26 2245.02,3830.43 2312.53,3819.81 2379.92,3808.42 2447.17,3796.25 2514.27,3783.31 2581.22,3769.59 2648.01,3755.1 2698.12,3743.61 2698.12,20.1 21.78,20.1 21.78,3743.63 71.84,3755.1 138.63,3769.59 205.57,3783.31 272.68,3796.25 339.93,3808.42 407.31,3819.81 474.82,3830.43 542.45,3840.26 610.19,3849.31 678.03,3857.58 745.96,3865.06 813.97,3871.76 882.06,3877.67 950.2,3882.8 1018.41,3887.14 1086.66,3890.69 1154.94,3893.45 1223.25,3895.42 1291.58,3896.61 1359.92,3897
VCC2V5 on VCCINT (split plane): 1428.26,3896.61 1496.59,3895.42 1564.91,3893.45 1633.19,3890.69 1701.44,3887.14 1769.64,3882.8 1837.79,3877.67 1905.87,3871.76 1973.89,3865.06 2041.82,3857.58 2109.65,3849.31 2177.39,3840.26 2245.02,3830.43 2312.53,3819.81 2379.92,3808.42 2447.17,3796.25 2514.27,3783.31 2581.22,3769.59 2648.01,3755.1 2698.12,3743.61 2698.12,3129.09 2693.6,3133.6 2691.95,3134.71 2690,3135.1 1725,3135.1 1723.05,3134.71 1721.4,3133.6 1586.4,2998.6 1585.29,2996.95 1584.9,2995 1584.9,285 1585.29,283.05 1586.4,281.4 1671.4,196.4 1673.05,195.29 1675,194.9 2690,194.9 2691.95,195.29 2693.6,196.4 2698.12,200.91 2698.12,20.1 21.78,20.1 21.78,3743.63 71.84,3755.1 138.63,3769.59 205.57,3783.31 272.68,3796.25 339.93,3808.42 407.31,3819.81 474.82,3830.43 542.45,3840.26 610.19,3849.31 678.03,3857.58 745.96,3865.06 813.97,3871.76 882.06,3877.67 950.2,3882.8 1018.41,3887.14 1086.66,3890.69 1154.94,3893.45 1223.25,3895.42 1291.58,3896.61 1359.92,3897
+5V on VCCINT (split plane): 2694.9,3117.89 2694.9,212.11 2687.89,205.1 1677.11,205.1 1595.1,287.11 1595.1,2992.89 1727.11,3124.9 2687.89,3124.9

## Keep-outs
Top Layer:
  circle w10: c2390.4,121.11 r98.43
  circle w10: c122.69,3648.67 r98.43
Bottom Layer:
  circle w10: c2390.4,121.11 r98.43
  circle w10: c122.69,3648.67 r98.43
  rectangle: 2111.92,3377.66 2308.77,3472.14
Keep-Out Layer:
  lines w31.5: 1.68,-1048.3 1.68,3759.55 cw(c1359.92,-2020.01) 2718.19,3759.54 2718.22,-1050.3 3.68,-1050.3 1.68,-1048.3

## Other copper
Bottom Layer:
  region: 2202.47,1109.94 2257.59,1109.94
VCCINT (plane layer: these items are gaps in the copper):
  lines w10: 1590,285 1675,200 1800,200 2690,200 2700,210 2700,3120 2690,3130 1725,3130 1590,2995 1590,285
VCC1V2 (plane layer: these items are gaps in the copper):
  lines w10: 1735,1505 1940,1300 1940,290 2013.76,216.24 2121.24,216.24 2681.24,216.24 2690,225 2690,1535 2690,2365 2655,2400 2390,2400 2020,2400 1990,2370 1735,2115 1735,1505

## Silkscreen, mask and mechanical layers (free items; w line width, h text height)
Top Overlay:
  circle w5: c2560.74,2873.72 r98.43
  circle w5: c159.16,1338.29 r98.43
  circle w5: c2560.74,157.18 r62.99
  circle w5: c159.16,1338.29 r62.99
  circle w5: c159.16,1338.29 r108.27
  circle w5: c2560.74,2873.72 r62.99
  circle w5: c2560.74,2873.72 r108.27
  circle w10: c2245.78,1239.86 r106.3
  circle w10: c2218.22,901.28 r106.3
  circle w10: c1092.23,2952.46 r98.43
  lines w3.15: 1726.09,3259.55 1930.82,3259.55 1962.31,3291.04 ; 1733.97,3330.41 2041.05,3330.41 2080.42,3291.04 ; 2080.42,3330.41 2159.16,3330.41 2198.53,3291.04 ; 2316.64,3291.04 2356.01,3330.41 2462.31,3330.41 ; 2674.91,1680.81 2690.66,1696.55 2690.66,1869.78
  lines w5: 1.68,48.92 41.05,48.92 44.68,48.23 48.01,46.03 50.2,42.7 50.89,39.08 50.89,-0.3 ; 1.68,58.76 60.74,58.76 60.74,-0.3 ; 1.68,1490.85 80.42,1490.85 84.05,1491.54 87.38,1493.73 89.57,1497.06 90.26,1500.69 90.26,1530.22 89.57,1533.84 87.38,1537.18 84.05,1539.37 80.42,1540.06 1.68,1540.06 ; 1.68,2972.15 60.74,2972.15 60.74,3027.26 ; 1.68,2991.83 41.05,2991.83 44.68,2992.52 48.01,2994.71 50.2,2998.05 50.89,3001.67 50.89,3025.3 ; 1.73,3015.45 cw(c1359.97,-2764.1) 2718.22,3015.45 ; 1.73,3094.19 cw(c1359.97,-2685.36) 2718.22,3094.19 ; 2.02,859.51 92.57,859.51 92.57,934.31 2.05,934.31 ; 2.02,2091.79 92.57,2091.79 92.57,2166.59 2.05,2166.59 ; 119.79,1338.29 159.16,1338.29 ; 159.16,1298.92 159.16,1338.29 ; 159.16,1377.66 159.16,1338.29 ; 198.53,1338.29 159.16,1338.29 ; 619.79,3125.69 619.79,3074.51 670.97,3074.51 670.97,3129.63 ; 725.11,3136.52 725.11,3080.81 725.8,3077.18 727.99,3073.85 731.33,3071.66 734.95,3070.96 764.48,3070.96 768.1,3071.66 771.44,3073.85 773.63,3077.18 774.32,3080.81 774.32,3142.42 ; 730.03,216.24 769.4,216.24 ; 769.4,176.87 769.4,216.24 ; 769.4,255.61 769.4,216.24 ; 808.77,216.24 769.4,216.24 ; 1911.13,216.24 1950.5,216.24 ; 1945.58,3142.42 1945.58,3080.81 1946.27,3077.18 1948.46,3073.85 1951.8,3071.66 1955.42,3070.96 1984.95,3070.96 1988.57,3071.66 1991.91,3073.85 1994.1,3077.18 1994.79,3080.81 1994.79,3136.52 ; 1950.5,176.87 1950.5,216.24 ; 1950.5,255.61 1950.5,216.24 ; 1958.37,3141.44 1958.37,3098.13 2009.55,3098.13 2009.56,3137.5 ; 1989.87,216.24 1950.5,216.24 ; 2459,194.21 cw(c2560.74,157.18) 2484.18,80.63 ; 2468.25,190.85 cw(c2560.74,157.19) 2485.34,93.92 ; 2521.37,157.18 2560.74,157.18 ; 2521.37,2873.72 2560.74,2873.72 ; 2560.74,117.81 2560.74,157.18 ; 2560.74,196.55 2560.74,157.18 ; 2560.74,2834.35 2560.74,2873.72 ; 2560.74,2913.09 2560.74,2873.72 ; 2600.11,157.18 2560.74,157.18 ; 2600.11,2873.72 2560.74,2873.72 ; 2659.16,-0.3 2659.16,58.76 2718.22,58.76 ; 2659.16,3027.26 2659.16,2972.14 2718.22,2972.14 ; 2669,-0.3 2669,39.08 2669.7,42.7 2671.89,46.03 2675.22,48.23 2678.85,48.92 2718.22,48.92 ; 2669,3025.3 2669,3001.67 2669.7,2998.05 2671.89,2994.71 2675.22,2992.52 2678.85,2991.83 2718.22,2991.83 ; 2718.19,861.91 2627.66,861.91 2627.66,936.71 2718.22,936.71 ; 2718.22,1490.85 2639.48,1490.85 2635.85,1491.54 2632.52,1493.73 2630.33,1497.06 2629.63,1500.69 2629.63,1530.22 2630.33,1533.84 2632.52,1537.18 2635.85,1539.37 2639.48,1540.06 2718.22,1540.06 ; 2718.53,2094.19 2628.01,2094.19 2628.01,2169 2718.56,2169 ; 730.03,176.87 cw(c730.03,216.24) 730.03,255.61 808.77,255.61 cw(c808.77,216.24) 808.77,176.87 730.03,176.87 ; 1911.13,176.87 cw(c1911.13,216.24) 1911.13,255.61 1989.87,255.61 cw(c1989.87,216.24) 1989.87,176.87 1911.13,176.87
  text "LH79520 EXT DEBUG" at 1722.15,3779.23 h31.5
  text "OPEN: INTEGRATED" at 1269.4,3318.6 h31.5 r90
  text "CLOSED: EXTERNAL" at 1312.7,3318.6 h31.5 r90
  text "LH79520 DEBUG SELECT" at 1222.15,3263.48 h31.5 r90
  text "EXT DEBUG" at 2411.13,3169 h31.5
  text "ALL" at 1052.86,2980.02 h31.5
  text "4k7" at 1048.93,2932.78 h31.5
  text "ALL" at 2206.41,1255.61 h31.5
  text "100nF" at 2198.53,1208.37 h31.5
  text "ALL" at 2194.59,913.09 h31.5
  text "10nF" at 2202.47,865.85 h31.5
  text "LOADED" at 682.78,66.63 h31.5
  text "POWER" at 1891.45,66.63 h31.5
  text "Altium Advanced Training: '.Pcb_File_Name_No_Path'" at 20,-1163.34 h50
Bottom Overlay:
  drawing of 888 lines, arcs and shapes, not listed
  text "NBP#28" at 2378.59,3715.6 h31.5
  text "REV 1.00" at 2047.89,3711.66 h31.5
  text "1" at 551.68,2299.7 h31.5
  text "1" at 543.95,345.52 h31.5
Mechanical 1:
  lines w9.84: 1.67,-1100.45 1.7,3759.55 cw(c1359.95,-2020) 2718.22,3759.54 2718.22,-1100.45 ; 1.68,-1100.3 2718.22,-1100.3
  text "PCB boundary coincides with centre-line of tracks and arc" at -3.24,-1516.76 h31.5
Mechanical 2:
  text ".Printout_Name" at -3.24,-1280.54 h31.5
Mechanical 3:
  text ".Printout_Name" at -3.24,-1438.02 h31.5
Mechanical 11:
  drawing of 689 lines, arcs and shapes, not listed
  text "NBP28 Rev1.00" at 10720.76,8505.7 h50
  text "DESIGN INFORMATION" at 8515.76,8500.7 h60
  text "BOARD NAME:" at 9995.76,8500.7 h60
  text "BOARD TECHNOLOGY" at 8515.76,8400.7 h60
  text "BOARD SIZE (REFER ALSO PROFILING INFORMATION)" at 10415.76,8400.7 h50
  text "5.000" at 8599.26,8314.52 h60
  text "69.00mm" at 10522.84,8311.18 h60
  text "12.000" at 9135.39,8308.57 h60
  text "81.00mm" at 11428.36,8307.24 h60
  text "5.000" at 9687.77,8302.71 h60
  text "X" at 11150.76,8280.7 h70
  text "(MIN. TRACK/   PADS  /   CLEARANCE     IN 0.001'')" at 8455.76,8200.7 h50
  text "MINIMUM ANNULAR RING 0.125MM (0.005'') EXTERNAL PER IPC-2221 CLASS 3 LEVEL C AND IS THE" at 8515.76,8100.7 h50
  text "MANUFACTURING REGISTRATION ALLOWANCE" at 8515.76,8010.7 h50
  text "LAND SIZE CALCULATION MINIMUM - NOMINAL HOLE SIZE + 0.508MM (0.020'')" at 8515.76,7900.7 h50
  text "CIRCUIT TYPE:" at 8515.76,7720.7 h60
  text "SS" at 9415.76,7720.7 h50
  text "DS" at 10115.76,7720.7 h50
  text "X" at 10690.76,7720.7 h60
  text "PTH" at 10815.76,7720.7 h50
  text "ML" at 11245.76,7720.7 h50
  text "X" at 11395.76,7720.7 h60
  text "No. OF" at 11515.76,7720.7 h50
  text "8" at 12199.26,7714.52 h60
  text "FINGER CONNECTOR DIM PER:" at 8515.76,7600.7 h60
  text "AS SHOWN" at 11515.76,7600.7 h50
  text "No. OFF TOTAL" at 9175.76,7490.7 h60
  text "ONE SIDE" at 10815.76,7490.7 h50
  text "BOTH SIDES" at 11515.76,7480.7 h50
  text "VIAS:" at 8515.76,7375.7 h60
  text "NONE" at 8965.76,7375.7 h45
  text "X" at 9295.76,7375.7 h60
  text "FEED THRU'" at 9415.76,7375.7 h45
  text "TENTED" at 10115.76,7375.7 h45
  text "BURIED LAYER SEQUENCE" at 10815.76,7375.7 h45
  text "UNIQUE DRILL" at 9415.76,7255.7 h45
  text "2 SIZE" at 10115.76,7255.7 h45
  text "BLIND LAYER SEQUENCE" at 10815.76,7255.7 h45
  text "Layer Stack Manager (Protel)" at 9910.76,7165.7 h50
  text "X" at 11395.76,7165.7 h60
  text "AS SHOWN" at 11515.76,7165.7 h50
  text "LAYER CONSTRUCTION PER:" at 8515.76,7160.7 h60
  text "Protel" at 11705.76,7060.7 h50
  text "(PFW)" at 12110.76,7055.7 h50
  text "ARTWORK:" at 8515.76,7050.7 h60
  text "MANUAL" at 9415.76,7050.7 h50
  text "DIGITISED" at 10115.76,7050.7 h50
  text "X" at 10695.76,7050.7 h60
  text "CAD" at 10815.76,7050.7 h50
  text "TYPE" at 11245.76,7050.7 h50
  text "ARTWORK/PATTERN MASTER LIST" at 8515.76,6865.7 h60
  text "DESCRIPTION" at 8565.76,6770.7 h50
  text "DRAWING No./CAD FILE REF." at 9300.76,6770.7 h50
  text "LAYER NAME" at 10925.76,6770.7 h50
  text "GERBER FILE REF" at 11742.77,6767.71 h50
  text "PCB FILE" at 8505.76,6670.7 h50
  text "NBP28 Rev1.00" at 9307.29,6668.46 h50
  text "PcbDoc" at 10537.77,6667.71 h40
  text "Top Paste Mask" at 10859.77,6570.7 h40
  text "GTP" at 12537.77,6567.71 h50
  text "GERBER FILE" at 8505.76,6565.7 h50
  text "GTO" at 12535.76,6469.72 h50
  text "Top Overlay" at 10859.77,6468.7 h40
  text "GERBER FILE" at 8505.76,6465.7 h50
  text "Top Solder Mask" at 10859.77,6372.71 h40
  text "GTS" at 12537.77,6367.71 h50
  text "GERBER FILE" at 8505.76,6365.7 h50
  text "TOP LAYER" at 10859.77,6270.7 h40
  text "GTL" at 12537.77,6267.71 h50
  text "GERBER FILE" at 8505.76,6265.7 h50
  text "MIDLAYER3" at 10859.8,6170.77 h40
  text "G3" at 12533.03,6170.77 h50
  text "GERBER FILE" at 8505.76,6165.7 h50
  text "MIDLAYER1" at 10859.8,6072.35 h40
  text "G1" at 12533.03,6072.35 h50
  text "GERBER FILE" at 8505.76,6065.7 h50
  text "VCC" at 10859.77,5970.7 h40
  text "GERBER FILE" at 8505.76,5965.7 h50
  text "GP2" at 12537.77,5961.41 h50
  text "GND" at 10859.8,5875.5 h40
  text "GP1" at 12533.03,5875.5 h50
  text "GERBER FILE" at 8505.76,5865.7 h50
  text "VCCINT" at 10859.8,5777.07 h40
  text "GERBER FILE" at 8505.76,5765.7 h50
  text "GP3" at 12537.77,5764.56 h50
  text "MIDLAYER2" at 10859.8,5678.65 h40
  text "GERBER FILE" at 8505.76,5665.7 h50
  text "G2" at 12537.77,5666.14 h50
  text "BOTTOM LAYER" at 10859.77,5570.7 h40
  text "GBL" at 12537.77,5567.71 h50
  text "GERBER FILE" at 8505.76,5565.7 h50
  text "Bottom Solder Mask" at 10859.77,5472.71 h40
  text "GBS" at 12537.77,5467.71 h50
  text "GERBER FILE" at 8505.76,5465.7 h50
  text "Bottom Overlay" at 10859.77,5370.7 h40
  text "GBO" at 12537.77,5367.71 h50
  text "GERBER FILE" at 8505.76,5365.7 h50
  text "Bottom Paste Mask" at 10859.77,5272.71 h40
  text "GBP" at 12537.77,5267.71 h50
  text "GERBER FILE" at 8505.76,5265.7 h50
  text "PCB Boundary" at 10859.77,5170.7 h40
  text "GM1" at 12537.77,5167.71 h50
  text "GERBER FILE" at 8505.76,5165.7 h50
  text "Dimensions" at 10859.77,5070.7 h40
  text "GM4" at 12537.77,5067.71 h50
  text "GERBER FILE" at 8505.76,5065.7 h50
  text "APERTURE LIST" at 8505.76,4970.7 h50
  text "APR" at 10577.14,4967.71 h50
  text "DRILL REPORT" at 8505.76,4870.7 h50
  text "DRR" at 10577.14,4867.71 h50
  text "DRILL FILE" at 8495.28,4768.07 h50
  text "DRL" at 10572.21,4762.4 h50
  text "TXT" at 10566.15,4667.67 h50
  text "EXCELLON DRILL" at 8492.33,4664.72 h50
  text "MATERIAL:" at 8515.76,4460.7 h60
  text "GLASS FIBRE EPOXY RESIN NEMA GRADE FR4 (MIL-S-13949H)" at 9525.76,4450.7 h50
  text "X" at 9420.76,4445.7 h60
  text "THICKNESS:" at 8825.76,4335.7 h50
  text "0.8mm" at 9525.76,4335.7 h50
  text "1.2mm" at 10220.76,4335.7 h50
  text "1.6mm" at 10915.76,4335.7 h50
  text "2.4mm" at 11615.76,4335.7 h50
  text "3.2mm" at 12315.76,4335.7 h50
  text "X" at 10820.76,4330.7 h60
  text "TOLERANCE:" at 8820.76,4215.7 h50
  text "IN A/W IPC-D-300G CLASS" at 9515.76,4215.7 h50
  text "3 LEVEL B" at 10890.76,4215.7 h50
  text "OTHER +/-" at 11615.76,4215.7 h50
  text "X" at 9420.76,4210.7 h60
  text "BOW & TWIST:" at 8725.76,4095.7 h50
  text "IN A/W IPC-D-300G CLASS" at 9515.76,4095.7 h50
  text "3 LEVEL B" at 10890.76,4095.7 h50
  text "AS SHOWN" at 11620.76,4090.7 h50
  text "X" at 9420.76,4085.7 h60
  text "COPPER THICKNESS (FINISHED)" at 8820.76,3965.7 h50
  text "OUTER:" at 9010.76,3875.7 h50
  text "18um" at 9525.76,3875.7 h50
  text "35um" at 10590.76,3875.7 h50
  text "70um" at 11625.76,3875.7 h50
  text "X" at 10482.77,3867.71 h60
  text "INNER SIGNAL:" at 8680.76,3755.7 h50
  text "18um" at 9525.76,3755.7 h50
  text "35um" at 10590.76,3755.7 h50
  text "70um" at 11625.76,3755.7 h50
  text "X" at 10480.76,3747.71 h60
  text "INNER PWR:" at 8825.76,3635.7 h50
  text "18um" at 9525.76,3635.7 h50
  text "35um" at 10590.76,3635.7 h50
  text "70um" at 11625.76,3635.7 h50
  text "X" at 10485.76,3630.7 h60
  text "STRUCTURE:" at 8515.76,3515.7 h60
  text "REFER" at 9525.76,3515.7 h50
  text "AS PER DRAWING No." at 9520.76,3390.7 h50
  text "AS SHOWN" at 11620.76,3390.7 h50
  text "X" at 11520.76,3385.7 h60
  text "DRILLING:" at 8515.76,3280.7 h60
  text "VIEWED FROM:" at 8710.76,3190.7 h50
  text "COMPONENT SIDE" at 9525.76,3190.7 h45
  text "SOLDER SIDE" at 10580.76,3190.7 h45
  text "X" at 9420.76,3180.7 h60
  text "REFERENCE:" at 8800.76,3070.7 h50
  text "AS SHOWN" at 9520.76,3065.7 h45
  text "PATTERN MASTER LIST" at 10585.76,3065.7 h45
  text "X" at 11520.76,3065.7 h60
  text "NC_DRILL FILES" at 11620.76,3065.7 h45
  text "X" at 9420.76,3060.7 h60
  text "PTH MINIMUM COPPER THICKNESS:" at 9030.76,2950.7 h50
  text "20um" at 10590.76,2950.7 h50
  text "X" at 10485.76,2945.7 h60
  text "OTHER" at 11620.76,2945.7 h50
  text "NPTH:" at 9050.76,2830.7 h50
  text "TENTED" at 9520.76,2825.7 h45
  text "X" at 10485.76,2825.7 h60
  text "PADS REMOVED" at 10585.76,2825.7 h45
  text "REMOVE PADS" at 11620.76,2825.7 h45
  text "X" at 9420.76,2820.7 h60
  text "2nd DRILL" at 9520.76,2705.7 h45
  text "BOTH" at 10585.76,2705.7 h45
  text "AS SHOWN" at 11070.76,2705.7 h45
  text "NONE" at 11620.76,2705.7 h45
  text "BOARD FINISH:" at 8515.76,2590.7 h60
  text "X" at 9420.76,2585.7 h60
  text "ETCHING" at 9520.76,2585.7 h45
  text "REFER PATTERN MASTER LIST" at 10585.76,2585.7 h45
  text "LEGEND / SCREEN PRINT:" at 9315.76,2470.7 h50
  text "NONE" at 10585.76,2465.7 h45
  text "COMPONENT" at 11070.76,2465.7 h45
  text "SOLDER" at 11620.76,2465.7 h45
  text "X" at 10970.76,2460.7 h60
  text "X" at 11520.76,2460.7 h60
  text "COLOUR:" at 8930.76,2350.7 h50
  text "WHITE" at 9520.76,2345.7 h45
  text "YELLOW" at 10585.76,2345.7 h45
  text "OTHER" at 11620.76,2345.7 h45
  text "X" at 9420.76,2340.7 h60
  text "X" at 9420.76,2225.7 h60
  text "LIQUID PHOTOIMAGEABLE" at 9520.76,2225.7 h45
  text "SCREEN PRINT" at 11070.76,2225.7 h45
  text "MATTE" at 9520.76,2105.7 h45
  text "GLOSS" at 10020.76,2105.7 h45
  text "GREEN" at 10585.76,2105.7 h45
  text "BLUE" at 11070.76,2105.7 h45
  text "G/Y" at 11620.76,2105.7 h45
  text "OTHER" at 12070.76,2105.7 h45
  text "X" at 9915.76,2100.7 h60
  text "SOLDER MASK COLOUR:" at 8515.76,1990.7 h45
  text "BLACK" at 9520.76,1985.7 h45
  text "GREEN" at 10020.76,1985.7 h45
  text "YELLOW" at 10585.76,1985.7 h45
  text "BLUE" at 11070.76,1985.7 h45
  text "OTHER" at 11620.76,1985.7 h45
  text "X" at 9415.76,1980.7 h60
  text "TRACK FINISH:" at 8515.76,1870.7 h60
  text "SELECTIVE SOLDER (HASL)" at 9520.76,1865.7 h45
  text "REFLOW SOLDER" at 11070.76,1865.7 h45
  text "SELECTIVE GOLD" at 9520.76,1745.7 h45
  text "um  (AREA" at 10585.76,1745.7 h45
  text "sq. mm)" at 11680.76,1745.7 h45
  text "X" at 9415.56,1626.14 h60
  text "IMMERSION GOLD" at 9520.76,1625.7 h45
  text "OTHER" at 11070.76,1625.7 h45
  text "EDGE BOARD" at 8515.76,1510.7 h60
  text "1.3um HARD GOLD OVER 5um     NICKEL / TIN-NICKEL" at 9520.76,1505.7 h45
  text "CONTACTS:" at 8515.76,1425.7 h60
  text "HARD FINISH GOLDE PLATE" at 9520.76,1385.7 h45
  text "OTHER" at 11070.76,1385.7 h45
  text "AS SHOWN" at 9520.76,1265.7 h45
  text "REFER" at 11070.76,1265.7 h45
  text "PROFILING:" at 8515.76,1145.7 h60
  text "AS DIMENSIONED, MEASURED AND CUT FROM SPECIFIED DATUM." at 9520.76,1145.7 h45
  text "X" at 9420.76,1140.7 h60
  text "REFER PCB BLANK DWG No." at 9525.76,1030.7 h50
  text "USE PROFILE / ROUTE TAPE SUPPLIED (REFER PATTERN MASTER LIST)" at 9525.76,910.7 h50
  text "SQUARE CUT" at 9525.76,790.7 h50
  text "N.C. ROUTE" at 10225.76,790.7 h50
  text "V. SCORE" at 10925.76,790.7 h50
  text "BLANK" at 11625.76,790.7 h50
  text "ACCEPTABILITY:" at 8515.76,685.7 h60
  text "MATERIALS AND WORKMANSHIP FOR ALL PRINTED WIRING BOARDS TO MEET" at 9390.76,680.7 h50
  text "OR EXCEED THE REQUIREMENTS OF:" at 9390.76,570.7 h50
  text "IPC-6011/12 AND IPC-A-600E" at 9530.76,465.7 h50
  text "1" at 10930.76,465.7 h50
  text "2" at 11280.76,465.7 h50
  text "X" at 11175.76,460.7 h60
  text "X" at 9425.76,455.7 h60
  text "3" at 11630.76,380.7 h50
  text "UL CERTIFICATION" at 9530.76,345.7 h50
  text "AUSTEL" at 10930.76,345.7 h50
  text "X" at 9425.76,340.7 h60
  text "ML-P-55110F GRP" at 9510.76,225.7 h40
  text "A" at 10230.76,225.7 h50
  text "B" at 10580.76,225.7 h50
  text "AS2546" at 10930.76,225.7 h50
  text "OTHER" at 11630.76,225.7 h50
  text "ADDITIONAL" at 8515.76,110.7 h60
  text "NONE" at 9530.76,100.7 h50
  text "SAMPLE PLAN" at 10230.76,100.7 h50
  text "MIL-P-55110E SERIAL Nos. PER ORDER" at 10930.76,100.7 h50
  text "REQUIREMENTS:" at 8515.76,15.7 h60
  text "NONE" at 9530.76,-19.3 h50
  text "X" at 10121.27,-25.44 h60
  text "QUALITY RELEASE REPORT" at 10224.85,-28.08 h50
  text "X" at 10122.02,-144.22 h60
  text "OTHER" at 10224.62,-146.5 h50
  text "MICROSECTION SAMPLE REQUIRED" at 10523.83,-146.5 h50
  text "NONE" at 10230.76,-259.3 h50
  text "REQUIRED" at 10930.76,-259.3 h50
  text "PER ORDER" at 11830.76,-259.3 h50
  text "ELECTRICAL TEST:" at 8515.76,-264.3 h60
  text "X" at 10825.76,-264.3 h60
  text "NONE" at 10230.76,-379.3 h50
  text "1 SIDE" at 10925.76,-379.3 h45
  text "2 SIDES" at 11365.76,-379.3 h45
  text "MIN. PITCH" at 11825.76,-379.3 h50
  text "0.5mm" at 12360.76,-379.3 h50
  text "SURFACE MOUNT:" at 8515.76,-384.3 h60
  text "X" at 11277.77,-387.29 h60
  text "NONE" at 10230.76,-499.3 h50
  text "FOIL" at 10930.76,-499.3 h50
  text "LEGEND" at 11380.76,-499.3 h50
  text "REFER" at 11825.76,-499.3 h50
  text "X" at 11274.81,-500.83 h60
  text "MANUFACTURER'S ID/LOGO:" at 8515.76,-504.3 h60
  text "ISO9001/AS3901" at 10380.76,-619.3 h50
  text "NONE" at 11825.76,-619.3 h50
  text "MANUFACTURER'S ACCREDITATION:" at 8515.76,-624.3 h60
  text "X" at 10275.76,-624.3 h60
  text "PER ORDER" at 10230.76,-739.3 h50
  text "REFER" at 10930.76,-739.3 h50
  text "PACKAGING AND HANDLING:" at 8515.76,-744.3 h60
  text "X" at 10125.76,-749.3 h60
Mechanical 16:
  drawing of 1883 lines, arcs and shapes, not listed
  text "1" at -1540.07,8694.68 h31.5
  text "2" at 390.59,8694.68 h31.5
  text "3" at 2329.94,8694.68 h31.5
  text "4" at 4270.59,8694.68 h31.5
  text "5" at 6210.59,8694.68 h31.5
  text "6" at 8140.59,8694.68 h31.5
  text "7" at 10090.59,8694.68 h31.5
  text "8" at 12020.59,8694.68 h31.5
  text "A" at -2411.41,7356.68 h31.5
  text "A" at 12888.59,7356.68 h31.5
  text "B" at -2411.41,4576.68 h31.5
  text "B" at 12888.59,4576.68 h31.5
  text "C" at -2411.41,1796.68 h31.5
  text "C" at 12888.59,1796.68 h31.5
  text "D" at -2411.41,-963.32 h31.5
  text "D" at 12888.59,-963.32 h31.5
  text "ENGINEER:" at 8363.59,-970.32 h31.5
  text "TITLE:" at 9863.59,-970.32 h31.5
  text "PCB DESIGNER:" at 8363.59,-1265.32 h31.5
  text "PART NO.:" at 9863.59,-1270.32 h31.5
  text "REV:" at 11963.59,-1270.32 h31.5
  text "DATE:" at 8363.59,-1570.32 h31.5
  text "DWG NO:" at 9863.59,-1570.32 h31.5
  text "SCALE:" at 11963.59,-1570.32 h31.5
  text "Altium Limited" at 7063.59,-1670.32 h31.5
  text ".PRINT_DATE" at 8413.59,-1690.32 h31.5
  text "12a Rodborough Rd" at 7063.59,-1770.32 h31.5
  text "Frenchs Forest" at 7063.59,-1870.32 h31.5
  text "FILE NAME:" at 8363.59,-1870.32 h31.5
  text "NSW 2086" at 7063.59,-1970.32 h31.5
  text ".PCB_FILE_NAME_NO_PATH" at 8413.59,-1990.32 h31.5
  text "1" at -1540.07,-2205.32 h31.5
  text "2" at 390.59,-2205.32 h31.5
  text "3" at 2329.94,-2205.32 h31.5
  text "4" at 4270.59,-2205.32 h31.5
  text "5" at 6210.59,-2205.32 h31.5
  text "6" at 8140.59,-2205.32 h31.5
  text "7" at 10090.59,-2205.32 h31.5
  text "8" at 12020.59,-2205.32 h31.5
Drill Drawing:
  text ".Legend" at -7.18,-1938.02 h31.5